# Altium PCB up_floor.PcbDoc
Units mil, origin at the board's own origin, x right, y up, seen from the top; angles counter-clockwise.
Board outline 1822 x 1679 mil, 2 copper layers (Top Layer, Bottom Layer); 53 components, 70 nets, 315 pads, 105 vias.
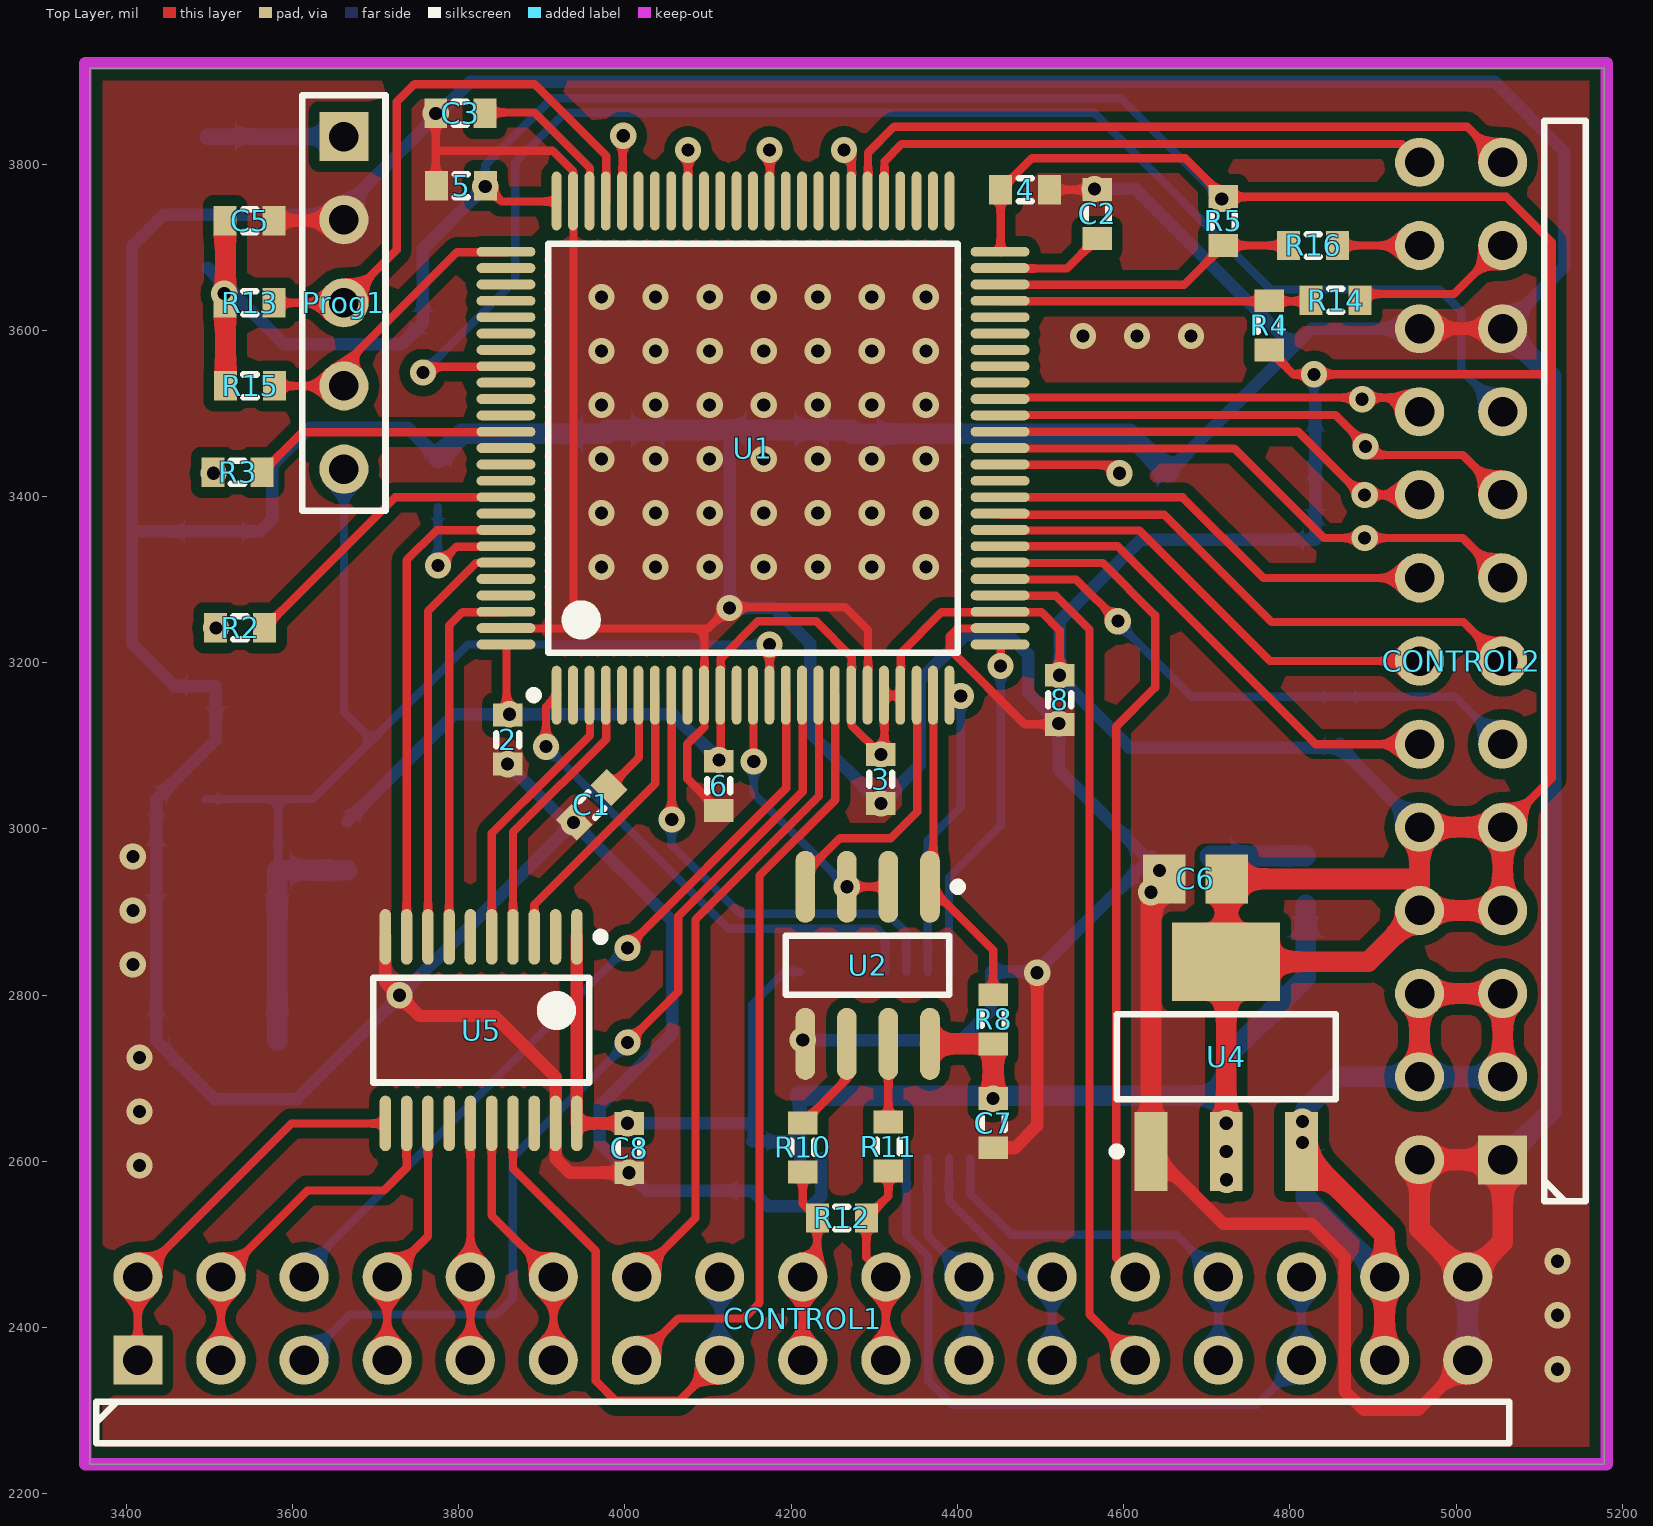
[diagram p0: Top Layer view]
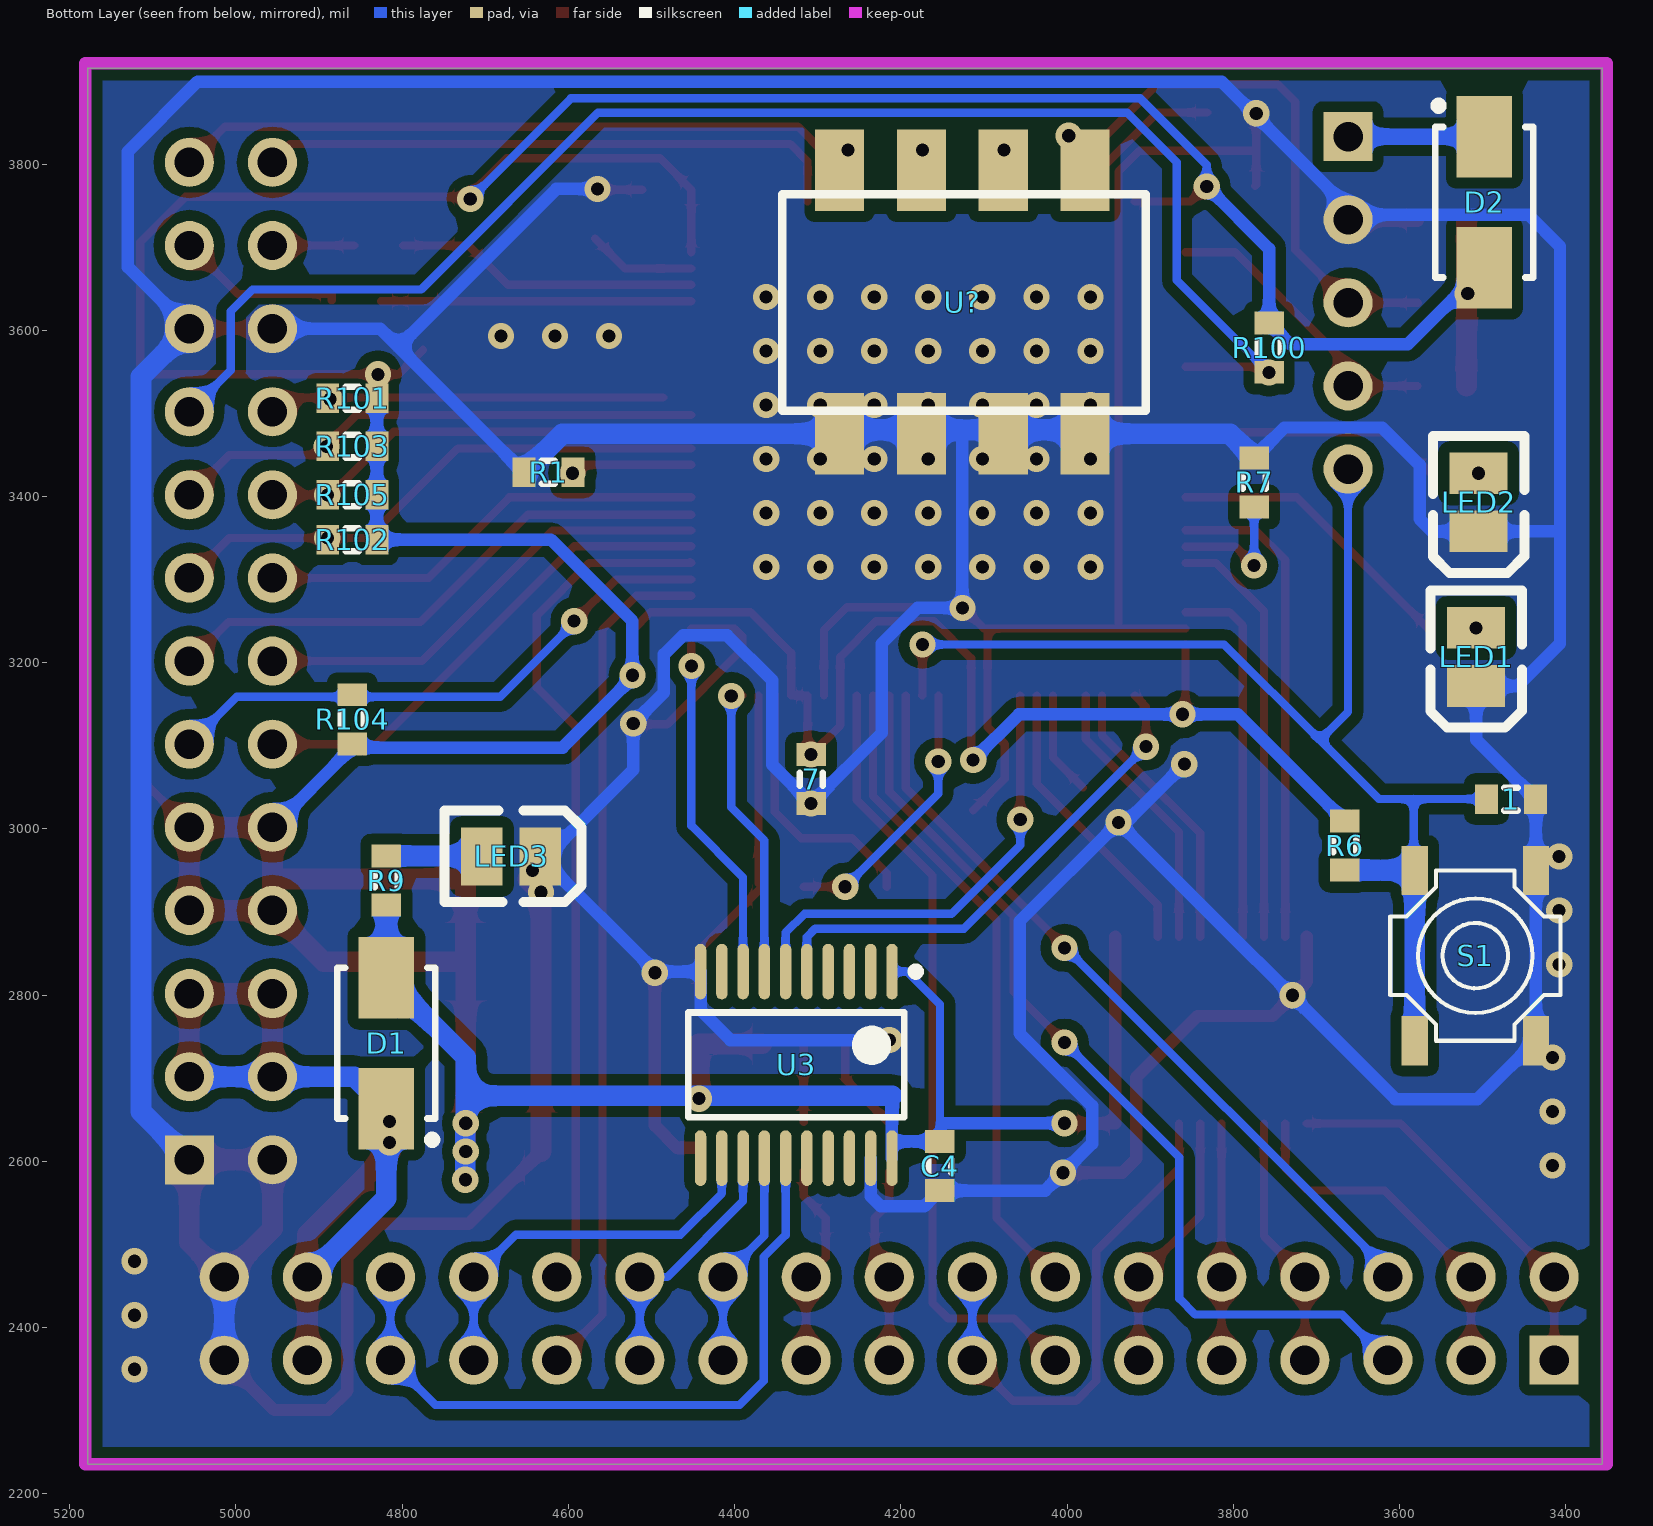
[diagram p1: Bottom Layer view, seen from below]

## Layer stack, top to bottom
Top Solder: solder mask 0.4, Solder Resist, Dk 3.5
Top Layer: signal copper 1.4
Dielectric 1: dielectric 12.6, FR-4, Dk 4.8
Bottom Layer: signal copper 1.4
Bottom Solder: solder mask 0.4, Solder Resist, Dk 3.5

## Board outline
3356,2236 5178,2236 5178,3915 3356,3915

## Design rules (kind name [scope] priority, off if disabled: settings)
AssemblyTestPointUsage [All] p1 off:
AssemblyTestpoint [All] p1 off: testpointundercomponent=TRUE minsize=40 maxsize=100 preferedsize=60 minholesize=0 maxholesize=40 preferedholesize=32 testpointgrid=1 usegrid=TRUE gridtolerance=0.01 allowsidetop=TRUE allowsidebottom=TRUE
Clearance Clearance_1 [All vs InPolygon] p1: gap=13 ignorepadtopadclearanceinfootprint=FALSE except(0: Arc-Hole Track-Hole SMDPad-Hole THPad-Hole Via-Hole Fill-Hole Poly-Hole Region-Hole Text-Hole)
Clearance [All] p2: gap=7 ignorepadtopadclearanceinfootprint=FALSE except(0: Arc-Hole Track-Hole SMDPad-Hole THPad-Hole Via-Hole Fill-Hole Poly-Hole Region-Hole Text-Hole)
ComponentClearance [All] p1 off: gap=10 collisioncheckmode=3 verticalgap=10 showdistances=FALSE
FabricationTestPointUsage [All] p1 off: valid=0 allowmultiple=FALSE
FabricationTestpoint [All] p1 off: side=3 testpointundercomponent=TRUE minsize=40 maxsize=100 preferedsize=60 minholesize=0 maxholesize=40 preferedholesize=32 testpointgrid=1 allowsidetop=TRUE allowsidebottom=TRUE usegrid=TRUE gridtolerance=0.01
Height [All] p1 off: minheight=0 maxheight=1000 prefheight=500
HoleSize [All] p1 off: absolutevalues=TRUE maxlimit=100 minlimit=1 maxpercent=80.000 minpercent=20.000
HoleToHoleClearance [All] p1 off: gap=10 allowstackedmicrovias=TRUE
LayerPairs [All] p1 off: enforce=TRUE
MinimumSolderMaskSliver [All] p1 off: minsoldermaskwidth=10
NetAntennae [All] p1 off: netantennaetolerance=0
PasteMaskExpansion [All] p1 off: expansion=0
PlaneConnect [All] p1: planeconnectstyle=Direct reliefexpansion=20 reliefentries=4 reliefconductorwidth=10 reliefairgap=10
PolygonConnect [All] p1: connectstyle=Direct reliefconductorwidth=10 reliefentries=4 polygonreliefangle="90 Angle" airgapwidth=10
RoutingVias [All] p1: holewidth=15.75 width=31.5 viastyle="Through Hole" minholewidth=11.81 minwidth=23.62 maxholewidth=28 maxwidth=50
SilkToSilkClearance [All] p1 off: silktosilkclearance=10
SilkToSolderMaskClearance [IsPad] p1 off: minsilkscreentomaskgap=10 clearancetoexposedcopper=TRUE
SolderMaskExpansion [All] p1 off: expansion=4
Width [All] p1: maxlimit=100 minlimit=10 preferedwidth=10
15 further rules are at their usual default settings.

## Components (designator, comment, footprint, x,y, rotation, side; value= is the part's Value field where it differs from the comment)
1 "" j1-0603 3466,3036 r0 bottom value=100nF
2 "" j1-0603 3859,3107.47 r90 top value=100nF
3 "" j1-0603 4308,3060 r90 top value=100nF
4 "" j1-0603 4481.47,3769 r180 top value=100nF
5 "" j1-0603 3803,3774 r0 top value=100nF
6 "" j1-0603 4113,3052 r90 top value=100nF
7 "" j1-0603 4308,3060 r90 bottom value=100nF
8 "" j1-0603 4523,3155.47 r90 top value=100nF
C1 "100uF/6V3" j1-0603 3960,3029 r45 top value=100nF
C2 "2.2uF" j1-0603 4568,3740 r90 top
C3 "2.2uF" j1-0603 3802,3861 r180 top
C4 "" j1-0603 4153,2594.53 r270 bottom value=100n
C5 "" j1-0603 3548.47,3732 r180 top value=100nF
C6 "Cap_El" 2012[0805] 4686.4,2940 r180 top value=10uF
C7 "Cap" j1-0603 4443,2646 r90 top value=100nF
C8 "" j1-0603 4005,2616 r270 top value=100n
CONTROL1 "" HDR2X17H 3414,2361 r0 top
CONTROL2 "" HDR2X13H 5056,2602 r90 top
D1 "1N4007" US1M 4819,2742.26 r270 bottom
D2 "1N4007" US1M 3498,3754 r90 bottom
LED1 "power" 3518 3508,3207 r270 bottom
LED2 "power" 3518 3505,3393 r270 bottom
LED3 "power" 3518 4669,2967 r180 bottom
Prog1 "Progrommer" HDR1x5 3662,3833 r270 top
R1 "10K" J1-0603 4624,3429 r180 bottom value=1K
R2 "Res1" j1-0603 3537,3242 r180 top value=220
R3 "Res1" j1-0603 3534,3429 r180 top value=220
R4 "4.7K" J1-0603 4775,3606 r90 top value=1K
R5 "4.7K" J1-0603 4720,3731.53 r270 top value=1K
R6 "10K" J1-0603 3666,2980 r270 bottom value=1K
R7 "10K" J1-0603 3775,3417 r270 bottom value=1K
R8 "Res1" j1-0603 4443,2771 r90 top value=10K
R9 "Res1" j1-0603 4819,2938 r90 bottom value=220
R10 "Res1" j1-0603 4214,2617 r270 top value=100
R11 "Res1" j1-0603 4317,2618 r270 top value=100
R12 "Res1" j1-0603 4261,2532 r0 top value=120
R13 "" J1-0603 3548.47,3633 r180 top value=10k
R14 "Res1" j1-0603 4855,3636 r0 top value=100
R15 "" J1-0603 3549,3533 r180 top value=10k
R16 "Res1" j1-0603 4828,3702 r0 top value=100
R100 "4k" j1-0603 3757,3579 r90 bottom
R101 "4k" j1-0603 4860,3518 r180 bottom
R102 "4k" j1-0603 4860,3348 r180 bottom
R103 "4k" j1-0603 4860,3460.69 r180 bottom
R104 "4k" j1-0603 4860,3132 r270 bottom
R105 "4k" j1-0603 4860,3402 r180 bottom
S1 "SW-PB" SW-PB-4P 3581.67,2745.28 r90 bottom
U1 "STM32F40X_41X-SQ100" 100A_N 4154.11,3458.24 r90 top
U2 "MAX485CSA" NSO8_N 4292,2836 r270 top
U3 "74hc245" 74hc245 4331.84,2718.2 r270 bottom
U4 "REG1117-3.3" SOT223 4723.45,2726.17 r90 top
U5 "74hc245" 74hc245 3821,2760 r270 top
U? "SW-DIP4" SW_NUM_4PIN 4126,3693 r180 bottom

## Footprints (in the part's own frame and the unit in brackets; to place one, negate y for a bottom-side part, rotate by r counter-clockwise, add the part's x,y. Pads: shape width x height; smd on the part's side, far side on the other; paste and mask are expansions set on the pad)
74hc245 [mm]
  oval 1.7x0.35 smd: 1(-2.799,3.077) 2(-2.799,2.427) 3(-2.799,1.777) 4(-2.799,1.127) 5(-2.799,0.477) 6(-2.799,-0.173) 7(-2.799,-0.823) 8(-2.799,-1.473) 9(-2.799,-2.123) 10(-2.799,-2.773) 11(2.901,-2.773) 12(2.901,-2.123) 13(2.901,-1.473) 14(2.901,-0.823) 15(2.901,-0.173) 16(2.901,0.477) 17(2.901,1.127) 18(2.901,1.777) 19(2.901,2.427) 20(2.901,3.077)
  silkscreen extent -2.92,-3.15 1.65,3.93, body extent -2.2,-3.15 2.3,3.45, height 1.2
100A_N [mm] "Thin QFP, 100-Leads, Body 14x14mm, Pitch 0.5mm, IPC Medium Density"
  oval 1.8x0.3 smd: 1(-7.55,6) 2(-7.55,5.5) 3(-7.55,5) 4(-7.55,4.5) 5(-7.55,4) 6(-7.55,3.5) 7(-7.55,3) 8(-7.55,2.5) 9(-7.55,2) 10(-7.55,1.5) 11(-7.55,1) 12(-7.55,0.5) 13(-7.55,0) 14(-7.55,-0.5) 15(-7.55,-1) 16(-7.55,-1.5) 17(-7.55,-2) 18(-7.55,-2.5) 19(-7.55,-3) 20(-7.55,-3.5) 21(-7.55,-4) 22(-7.55,-4.5) 23(-7.55,-5) 24(-7.55,-5.5) 25(-7.55,-6) 51(7.55,-6) 52(7.55,-5.5) 53(7.55,-5) 54(7.55,-4.5) 55(7.55,-4) 56(7.55,-3.5) 57(7.55,-3) 58(7.55,-2.5) 59(7.55,-2) 60(7.55,-1.5) 61(7.55,-1) 62(7.55,-0.5) 63(7.55,0) 64(7.55,0.5) 65(7.55,1) 66(7.55,1.5) 67(7.55,2) 68(7.55,2.5) 69(7.55,3) 70(7.55,3.5) 71(7.55,4) 72(7.55,4.5) 73(7.55,5) 74(7.55,5.5) 75(7.55,6)
  oval 0.3x1.8 smd: 26(-6,-7.55) 27(-5.5,-7.55) 28(-5,-7.55) 29(-4.5,-7.55) 30(-4,-7.55) 31(-3.5,-7.55) 32(-3,-7.55) 33(-2.5,-7.55) 34(-2,-7.55) 35(-1.5,-7.55) 36(-1,-7.55) 37(-0.5,-7.55) 38(0,-7.55) 39(0.5,-7.55) 40(1,-7.55) 41(1.5,-7.55) 42(2,-7.55) 43(2.5,-7.55) 44(3,-7.55) 45(3.5,-7.55) 46(4,-7.55) 47(4.5,-7.55) 48(5,-7.55) 49(5.5,-7.55) 50(6,-7.55) 76(6,7.55) 77(5.5,7.55) 78(5,7.55) 79(4.5,7.55) 80(4,7.55) 81(3.5,7.55) 82(3,7.55) 83(2.5,7.55) 84(2,7.55) 85(1.5,7.55) 86(1,7.55) 87(0.5,7.55) 88(0,7.55) 89(-0.5,7.55) 90(-1,7.55) 91(-1.5,7.55) 92(-2,7.55) 93(-2.5,7.55) 94(-3,7.55) 95(-3.5,7.55) 96(-4,7.55) 97(-4.5,7.55) 98(-5,7.55) 99(-5.5,7.55) 100(-6,7.55)
  silkscreen extent -7.67,-6.25 6.25,6.82, body extent -7,-7 7,7, height 1.2
2012[0805] [mm] "Chip Resistor; Body 2.0 x 1.3 mm (LxW typ)"
  rect 1.3x1.5 smd: 1(-0.95,0) 2(0.95,0)
  body extent -1.22,-0.75 1.28,0.75, height 0.5
3518 [mil]
  rect 50x70 smd: 1(35,0) 2(-35,0)
  silkscreen extent -80,-55 85,55, body extent -63,-31 63,32, height 43
HDR1x5 [mm] "Connector; Header; 5 Position"
  rect 1.5x1.5 hole 0.9: 1(0,0)
  round 1.5 hole 0.9: 2(2.54,0) 3(5.08,0) 4(7.62,0) 5(10.16,0)
  silkscreen extent -1.27,-1.27 11.43,1.27
HDR2X13H [mm] "Connector; Header; 13x2 Position; Right Angle"
  rect 1.5x1.5 hole 0.9: 1(0,0)
  round 1.5 hole 0.9: 2(0,2.54) 3(2.54,0) 4(2.54,2.54) 5(5.08,0) 6(5.08,2.54) 7(7.62,0) 8(7.62,2.54) 9(10.16,0) 10(10.16,2.54) 11(12.7,0) 12(12.7,2.54) 13(15.24,0) 14(15.24,2.54) 15(17.78,0) 16(17.78,2.54) 17(20.32,0) 18(20.32,2.54) 19(22.86,0) 20(22.86,2.54) 21(25.4,0) 22(25.4,2.54) 23(27.94,0) 24(27.94,2.54) 25(30.48,0) 26(30.48,2.54)
  silkscreen extent -1.27,-2.54 31.75,-1.27
HDR2X17H [mm] "Connector; Header; 17x2 Position; Right Angle"
  rect 1.5x1.5 hole 0.9: 1(0,0)
  round 1.5 hole 0.9: 2(0,2.54) 3(2.54,0) 4(2.54,2.54) 5(5.08,0) 6(5.08,2.54) 7(7.62,0) 8(7.62,2.54) 9(10.16,0) 10(10.16,2.54) 11(12.7,0) 12(12.7,2.54) 13(15.24,0) 14(15.24,2.54) 15(17.78,0) 16(17.78,2.54) 17(20.32,0) 18(20.32,2.54) 19(22.86,0) 20(22.86,2.54) 21(25.4,0) 22(25.4,2.54) 23(27.94,0) 24(27.94,2.54) 25(30.48,0) 26(30.48,2.54) 27(33.02,0) 28(33.02,2.54) 29(35.56,0) 30(35.56,2.54) 31(38.1,0) 32(38.1,2.54) 33(40.64,0) 34(40.64,2.54)
  silkscreen extent -1.27,-2.54 41.91,-1.27
j1-0603 [mm] "Chip Resistor, Body 1.6x0.8mm, IPC High Density"
  rect 0.7x0.9 smd: 1(-0.75,0) 2(0.75,0)
  silkscreen extent -0.2,-0.35 0.2,0.35, body extent -0.85,-0.48 0.85,0.48, height 0.9
J1-0603 [mm] "Chip Resistor, Body 1.6x0.8mm, IPC High Density"
  rect 0.7x0.9 smd: 1(-0.75,0) 2(0.75,0)
  silkscreen extent -0.2,-0.35 0.2,0.35, body extent -0.85,-0.48 0.85,0.48, height 0.9
NSO8_N [mm] "SOIC, 8-Leads, Body 4.9x3.9mm, Pitch 1.27mm, IPC Medium Density"
  oval 2.2x0.6 smd: 1(-2.4,1.905) 2(-2.4,0.635) 3(-2.4,-0.635) 4(-2.4,-1.905) 5(2.4,-1.905) 6(2.4,-0.635) 7(2.4,0.635) 8(2.4,1.905)
  silkscreen extent -2.52,-2.5 0.9,2.88, body extent -2,-2.5 2,2.5, height 1.75
SOT223 [mm] "SOT223, 4-Leads, Body 6.7x7.3mm (max), Pitch 2.30mm, IPC Medium Density"
  rect 2.4x1 smd: 1(-2.9,2.3) 2(-2.9,0) 3(-2.9,-2.3)
  rect 2.4x3.3 smd: 4(2.9,0)
  silkscreen extent -3.02,-3.35 1.3,3.47, body extent -1.85,-3.35 1.85,3.35, height 1.8
SW-PB-4P [mm]
  rect 1.5x0.8 smd: 1(0,0) 1(5.2,0) 2(0,-3.7) 2(5.2,-3.7)
  silkscreen extent 0,-4.45 5.2,0.75, body extent 0,-4.45 5.22,0.75, height 2.2
SW_NUM_4PIN [mm]
  rect 1.5x2.5 smd: 1(-3.75,-5.525) 2(-1.25,-5.525) 3(1.25,-5.525) 4(3.75,-5.525) 5(3.75,2.525) 6(1.25,2.525) 7(-1.25,2.525) 8(-3.75,2.525)
  silkscreen extent -5.5,-4.82 5.6,1.79
US1M [mm] "Molded Diode, 2-Leads, Body 4.3x2.6mm, IPC Medium Density"
  rect 2.5x1.7 smd: 1(-2,0) 2(2,0)
  silkscreen extent -2.3,-1.5 3.07,1.52, body extent -2.3,-1.46 2.3,1.46, height 2.3

## Part data
1 2 3 4 5 6 7 8 C5: library part Cap, "Capacitor", Manufacturer="Generic Components", Class=Passive, Published=08/06/2000, Publisher="Altium Hobart Technology Centre", SubClass=Capacitor
C1: library part Cap, "Capacitor", LatestRevisionDate=17-Jul-2002, LatestRevisionNote="Re-released for DXP Platform.", PackageReference=RAD-0.3, Published=8-Jun-2000, Publisher="Altium Limited"
C2 C3: library part Cap_UP, "Capacitor", LatestRevisionDate=17-Jul-2002, LatestRevisionNote="Re-released for DXP Platform.", PackageReference=RAD-0.3, Published=8-Jun-2000, Publisher="Altium Limited"
C4 C8: library part "Cap Pol1", "Polarized Capacitor (Radial)", Manufacturer="Generic Components", Class=Passive, Published=08/06/2000, Publisher="Altium Hobart Technology Centre", SubClass=Capacitor
C6 C7: "Capacitor", Publisher="Altium Limited"
  C6: PackageReference=CAPR5-4X5, Published=23-Sep-2002
  C7: LatestRevisionDate=17-Jul-2002, LatestRevisionNote="Re-released for DXP Platform.", PackageReference=RAD-0.3, Published=8-Jun-2000
CONTROL1: library part "Header 17X2H", "Header, 17-Pin, Dual row, Right Angle", LatestRevisionDate=17-Jul-2002, LatestRevisionNote="Re-released for DXP Platform.", Publisher="Altium Limited"
CONTROL2: library part "Header 13X2H", "Header, 13-Pin, Dual row, Right Angle", LatestRevisionDate=17-Jul-2002, LatestRevisionNote="Re-released for DXP Platform.", Publisher="Altium Limited"
D1 D2: library part Diode, "1 Amp General Purpose Rectifier", Package Information="Latest Revision: Aug-1999", Package Reference=DO-41, Code - JEDEC=DO-204-AL, Datasheet="Latest Revision: 1998", Published=8-Jun-2000, Publisher="Altium Limited", Revision 1="11-Jul-2000: SIM Model Added.", Revision 2="17-Jul-2002: Re-released for DXP Platform."
LED1 LED2 LED3: library part LED3, "Typical BLUE SiC LED", PackageDocument=16-Apr-2002, DatasheetDocument=16-Apr-2002, LatestRevisionDate=17-Dec-2003, LatestRevisionNote="PCB Footprint replaced.", PackageReference=3.5X2.8X1.9, Published=8-Jun-2000, Publisher="Altium Limited"
Prog1: library part "Header 5", "Header, 5-Pin", LatestRevisionDate=17-Jul-2002, LatestRevisionNote="Re-released for DXP Platform.", Publisher="Altium Limited"
R1 R4 R5 R6 R7 R100 R101 R102 R103 R104 R105: library part Res1, "Resistor", LatestRevisionDate=17-Jul-2002, LatestRevisionNote="Re-released for DXP Platform.", PackageReference=AXIAL-0.3, Published=8-Jun-2000, Publisher="Altium Limited"
R2 R3 R8 R9 R10 R11 R12 R14 R16: "Resistor", LatestRevisionDate=17-Jul-2002, LatestRevisionNote="Re-released for DXP Platform.", PackageReference=AXIAL-0.3, Published=8-Jun-2000, Publisher="Altium Limited"
R13 R15: library part Res, "Semiconductor Resistor", LatestRevisionDate=17-Jul-2002, LatestRevisionNote="Re-released for DXP Platform.", PackageReference=AXIAL-0.5, Published=8-Jun-2000, Publisher="Altium Limited"
S1: "Switch", LatestRevisionDate=17-Jul-2002, LatestRevisionNote="Re-released for DXP Platform.", PackageReference=SPST-2, Published=24-Mar-1999, Publisher="Altium Limited"
U2: "Low-Power, Slew-Rate-Limited RS-485/RS-422 Transceiver", Code_IPC=SOIC127P600-8, Code_JEDEC=MS-012-AA, ComponentLink1Description="Manufacturer Link", ComponentLink1URL=http://www.maxim-ic.com/, ComponentLink2Description=Datasheet, ComponentLink2URL=http://pdfserv.maxim-ic.com/en/ds/MAX1487-MAX491.pdf, DatasheetVersion=Feb-1996, LatestRevisionDate=13-Apr-2006, LatestRevisionNote="IPC-7351 Footprint Added.", PackageDescription="8-Pin Small Outline Integrated Circuit 1.27 mm Pitch", PackageReference=NSO8, Published=16-Jan-2001, Publisher="Altium Limited"
U4: "800mA and 1A Low Dropout Positive Regulator 2.85V, 3.3V, 5V, and Adjustable", ComponentLink1Description="Manufacturer Link", ComponentLink1URL=http://www.ti.com/, ComponentLink2Description=Datasheet, ComponentLink2URL=http://www-s.ti.com/sc/ds/REG1117.pdf, DatasheetVersion=Sep-1997, LatestRevisionDate=17-Jul-2002, LatestRevisionNote="Re-released for DXP Platform.", PackageDescription="SOT-223/SC-73; 4 Leads; Body 6.7 x 7.3 mm, inc. leads (LxW max)", PackageReference=ZZ311, PackageVersion=revC, Published=8-Jun-2000, Publisher="Altium Limited"

## Via types
v1: diameter 31.5, hole 15.75, Top Layer to Bottom Layer, tented both sides, 105 vias

## Nets (pads, with @x,y where several pads share a name; then routed paths per layer and width w, separated by ;. In a path a pad name is that pad's centre, name@x,y a point inside that pad or via, vN(x,y) a via of type N, cw(c..) or ccw(c..) an arc to the next point about the centre after c; other vN are vias at no path point)
+3.3: 2.2 3.2 4.2 5.2 6.2 7.2 8.2 C4.1 C5.2 C6.1 C7.2 C8.1 CONTROL2.7 CONTROL2.8 CONTROL2.9 CONTROL2.10 D1.1 D2.1 R4.1 R5.1 R6.1 R8.1 R9.1 R13.2 R15.2 R100.2 R101.2 R102.2 R103.2 R104.2 R105.2 U1.11 U1.19 U1.21 U1.22 U1.28 U1.50 U1.75 U1.100 U2.8 U3.1 U3.20 U4.2 U4.4 U5.1 U5.20 | length 9325.4
  Top Layer w10: 5.2 3851.54,3754.98 U1.75@3918.54,3754.98 ; U1.100@3857.51,3221.52 3857.51,3138.49 2.2 ; 6.2 4115.39,3083.91 4115.39,3205.39 4159.75,3249.75 4230.25,3249.75 4272.87,3207.13 4272.87,3124.66 v1(4308,3089.53) 4312.24,3093.76 4312.24,3160.5 4331.92,3160.5 4331.92,3211.92 4380.89,3260.89 4501.11,3260.89 4523,3239 v1(4523,3185) ; U1.50@4452,3693.96 4452,3768.95 4.2 4489.94,3807 4674.06,3807 R5.1 4720,3760.47 5060.53,3760.47 5115,3706 5115,3547 ; R4.1 4804.47,3547 v1(4829,3547) 5115,3547 ; CONTROL2.9 5115,3061 5115,3547
  Top Layer w15: U5.1 U5.20 4004.73,2645.8 C8.1
  Top Layer w25: C5.2 3519.47,3731.47 R15.2 ; U2.8 R8.1 R8.1 v1(4443,2675.53) ; v1(4723.45,2612) v1(4723.45,2646) U4.4 ; U4.4 4894.35,2840.35 CONTROL2.8 ; U4.4 4723.8,2840.7 C6.1 4955,2940 4956,2939 ; CONTROL2.8 4956,2939 ; CONTROL2.8 CONTROL2.7 CONTROL2.9 CONTROL2.10 4956,2939
  Bottom Layer w10: v1(3832,3773) 3832,3799 3912,3879 4597,3879 v1(4718,3758) ; C4.1 4153,2789 4192.41,2828.41 U3.1 ; v1(4829,3547) 4829,3519.47 R101.2
  Bottom Layer w15: D2.1 3590.26,3583 3731.47,3583 R100.2 3757,3698 v1(3832,3773) ; R6.1 3794.47,3138 v1(3861,3138) 4058,3138 v1(4113,3083) ; v1(4003,2646) 4151,2646 ; C4.1 U3.20@4210.69,2624.06 ; U3.20 U3.20@4210.69,2624.06 ; 4210.69,2679 U3.20@4210.69,2624.06 ; v1(4723.45,2646) 4723.45,2647.55 4724,2647 v1@4724,2646 ; R101.2 R103.2 R105.2 R102.2 4621,3348 4523,3250 v1(4523,3185) 4523,3182 4607,3098 R104.2@4860,3098 ; R104.2 R104.2@4860,3098 ; CONTROL2.10 R104.2@4860,3098
  Bottom Layer w25: 4210.69,2679 4723.45,2679 ; v1@4723.45,2647.55 4723.45,2679 ; v1(4724,2578) v1@4724,2646 ; R9.1 D1.1 4723.45,2725.45 4723.45,2679
  other v1: 3518,3644
+5: CONTROL1.31 CONTROL1.32 CONTROL2.3 CONTROL2.4 CONTROL2.5 CONTROL2.6 D1.2 U4.3 | length 1087.2
  Top Layer w25: U4.3 4914,2512 CONTROL1.32 CONTROL1.31 ; CONTROL2.4 CONTROL2.6 CONTROL2.5 CONTROL2.3
  Bottom Layer w25: CONTROL1.32 4819,2556 D1.2 4857.48,2702 CONTROL2.4 CONTROL2.3
  other v1: 4815,2623 4815,2648
A_RESET: 1.2 Prog1.5 R6.2 S1.1 U1.14 | length 1532.4
  Top Layer w10: v1(4174,3222) 4174,3160.94 U1.14@4174.44,3160.5
  Bottom Layer w10: 1.2 3583,3036 ; S1.1@3581.67,2950 3582.14,2950.47 3583,2951.33 3583,3036 ; Prog1.5 3662,3141 3696,3107 ; v1(4174,3222) 3811,3222 3696,3107 ; 3583,3036 3625,3036 3696,3107
  Bottom Layer w25: S1.1@3581.67,2745.28 S1.1@3581.67,2950 ; S1.1@3582.14,2950.47 R6.2
AD0: U1.57 U?.8 | length 65.9
  Top Layer w10: v1(4263.56,3817) 4272.87,3807.69 U1.57@4272.87,3754.98
AD1: U1.62 U?.7 | length 62.2
  Top Layer w10: v1(4174,3817) 4174.44,3816.56 U1.62@4174.44,3754.98
AD2: U1.67 U?.6 | length 63
  Top Layer w10: U1.67@4076.02,3754.98 v1(4076,3817) v1@4076.02,3817.98
AD3: U1.71 U?.5 | length 79.3
  Top Layer w10: U1.71@3997.28,3754.98 3997.28,3833.28 v1(3998,3834)
ADC_extra: CONTROL2.16 U1.35 | length 544.2
  Top Layer w10: U1.35@4452,3399 4671,3399 4768,3302 CONTROL2.16
Current1: CONTROL1.26 U1.31 | length 1038.9
  Top Layer w10: U1.31@4453.3,3321.25 4452,3319.94 4575.06,3319.94 4638,3257 4638,3170 4591,3123 4591,2484 CONTROL1.26
Current2: CONTROL1.6 U1.15 | length 940.5
  Top Layer w10: v1(4003,2857) 4003,2858.24 4194.13,3049.36 U1.15@4194.13,3160.5
  Bottom Layer w10: CONTROL1.6 3614,2469.24 4001.76,2857 v1(4003,2857)
Current3: CONTROL1.14 U1.17 | length 790.4
  Top Layer w10: CONTROL1.14 4085,2532 4085,2891.04 4233.5,3039.54 U1.17@4233.5,3160.5
Current11: CONTROL1.25 U1.29 | length 1025.6
  Top Layer w10: U1.29@4452,3280.57 4518.43,3280.57 4559,3240 4559,2416 CONTROL1.25
Current22: CONTROL1.5 U1.16 | length 1151.6
  Top Layer w10: v1(4003,2743) 4064,2804 4064,2895 4213.81,3044.81 U1.16@4213.81,3160.5
  Bottom Layer w10: CONTROL1.5 3669,2416 3846,2416 3865,2435 3865,2605 v1(4003,2743)
Current33: CONTROL1.13 U1.18 | length 944.8
  Top Layer w10: CONTROL1.13 4064,2411 4143,2411 4162,2430 4162,2944 4253.18,3035.18 U1.18@4253.18,3160.5
D+: CONTROL1.17 CONTROL1.18 R10.2 R12.1 | length 240.9
  Top Layer w10: CONTROL1.17 CONTROL1.18 4231.47,2478.47 R12.1 4214,2549.47 R10.2
D-: CONTROL1.19 CONTROL1.20 R11.2 R12.2 | length 248.2
  Top Layer w10: CONTROL1.19 CONTROL1.20 4290.53,2484.47 R12.2 4317,2558.47 R11.2
EN_max: U1.13 U2.2 U2.3 | length 326.5
  Top Layer w10: U1.13@4154.76,3160.5 4154.76,3081.24 v1(4155,3081) ; v1(4267,2930.49) U2.2
  Bottom Layer w10: v1(4155,3081) 4155,3042.49 v1(4267,2930.49)
encoder1: CONTROL2.11 R104.1 U1.30 | length 689.1
  Top Layer w10: U1.30@4452,3300.26 4542.74,3300.26 v1(4593,3250)
  Bottom Layer w10: v1(4593,3250) 4592,3250 4591.5,3249.5 4682,3159 4999,3159 CONTROL2.11
encoder2: CONTROL2.15 R102.1 U1.38 | length 668.5
  Top Layer w10: U1.38@4452,3457.74 4733.26,3457.74 4841,3350 v1(4890,3350) 5008,3350 CONTROL2.15
encoder3: CONTROL2.19 R100.1 U1.83 | length 1805.8
  Top Layer w10: v1(3757,3549) 3764.17,3556.17 U1.83@3857.51,3556.17
  Bottom Layer w10: v1(3757,3549) 3868,3660 3868,3802 3927.75,3861.75 4564.25,3861.75 4777,3649 4980,3649 5006,3623 5006,3552 CONTROL2.19
encoder_dir1: CONTROL2.18 R105.1 U1.39 | length 540.2
  Top Layer w10: U1.39@4452,3478 4810,3478 4886,3402 v1(4890,3402) CONTROL2.18 CONTROL2.18@4952.69,3398.69
Encoder_dir2: CONTROL2.17 R103.1 U1.40 | length 643.8
  Top Layer w10: U1.40@4452,3498 4855,3498 4903,3450 5008,3450 CONTROL2.17
  other v1: 4891,3460
Encoder_dir3: CONTROL2.20 R101.1 U1.41 | length 478.1
  Top Layer w10: U1.41@4486,3519 4939,3519 CONTROL2.20 CONTROL2.20@4955.25,3501.25
  other v1: 4887,3517
Fan_EN: CONTROL1.29 CONTROL1.30 U3.15 | length 862.3
  Bottom Layer w10: U3.15 4338.64,2511.36 4365,2485 4365,2336 4394,2307 4760,2307 CONTROL1.29 CONTROL1.30
GND: 1.1 2.1 3.1 4.1 5.1 6.1 7.1 8.1 C1.1 C2.2 C3.2 C4.2 C5.1 C6.2 C7.1 C8.2 CONTROL1.33 CONTROL1.34 CONTROL2.1 CONTROL2.2 CONTROL2.21 CONTROL2.22 LED1.1 LED2.1 LED3.1 Prog1.2 R1.1 R7.1 S1.2 U1.10 U1.20 U1.27 U1.74 U1.99 U2.5 U3.10 U3.19 U4.1 U5.10 U5.19 U?.1 U?.2 U?.3 U?.4 | length 13944.7
  Top Layer w10: v1(3772.47,3861) 3772.47,3818 ; 5.1 3772.47,3775 3772.47,3818 ; U1.99@3857.51,3241.2 3939,3241.2 ; 6.1 4075,3060.47 4075,3102 4095.7,3122.7 4095.7,3241.2 ; U1.20@4292.55,3160.5 4292.55,3239.45 4265.25,3266.75 4125.75,3266.75 4100.2,3241.2 4095.7,3241.2 ; U1.27@4452,3241.2 4400.2,3241.2 4391,3232 4391,3216 4481.06,3125.94 8.1 ; 4.1 4567.47,3769 C2.2 ; 3772.47,3818 3774.49,3815.98 3912.98,3815.98 3938.22,3790.74 3938.22,3241.98 3939,3241.2 ; 3939,3241.2 4095.7,3241.2
  Top Layer w15: C5.1 3661,3732 Prog1.2 ; U5.10 3711.84,2816.16 3753,2775 3843,2775 3916.57,2701.43 U5.19 3916.57,2603.43 3933.53,2586.47 v1(4005,2586.47) ; C7.1 4469.47,2616.47 4496,2643 v1(4496,2827) ; U4.1 4719.9,2525 4826,2525 4866,2485 4866,2324 4889,2301 4954,2301 CONTROL1.33 ; CONTROL2.22 CONTROL2.21
  Top Layer w25: U4.1 v1(4632.9,2923.9) C6.2 ; 4956,2519 CONTROL2.2 CONTROL2.1 5056,2503 CONTROL1.34 4956,2519
  Bottom Layer w15: Prog1.2 Prog1.2@3662,3738.97 ; R7.1 3738.53,3483 3621,3483 3576,3438 3576,3373 3561,3358 LED2.1 3409,3358 3407,3360 ; v1(3859,3077.94) 3928.94,3008 v1(3938,3008) ; 4121,3480.07 4126,3475.07 v1(4126,3266) 4180,3266 4223,3223 4223,3115.47 v1(4308,3030.47) 4355,3077.47 4355,3179 4409,3233 4462,3233 4485,3210 4485,3164 v1(4522,3127) 4522,3071 LED3.1@4630,2963 ; v1(4214,2746) 4405,2746 4441,2782 U3.10 4495.41,2828.41 LED3.1@4630,2963 ; U3.19 4236.28,2558.28 4224,2546 4172,2546 C4.2 4026.47,2565 v1(4005,2586.47) 3970,2621.47 3970,2667 4057,2754 4057,2889 v1(3938,3008) ; v1(4565,3770) 4614.53,3770 4804.53,3580 ; LED3.1 LED3.1@4630,2963 ; v1(4643,2950) LED3.1@4630,2963 ; R1.1 4804.53,3580 ; CONTROL2.22 4826.53,3602 4804.53,3580 ; CONTROL2.21 5130,3676 5130,3815 5046,3899 3814,3899 3662,3747 Prog1.2@3662,3738.97 ; 3407,3360 3407,3701 3444.97,3738.97 Prog1.2@3662,3738.97 ; 3407,3360 3407,3223 3458,3172 LED1.1 3508,3107.53 1.1 3436,3035.53 3436,2950 3436,2745.28 3506.28,2675 3605,2675 v1(3938,3008)
  Bottom Layer w25: R7.1 3803.95,3475.48 U?.4 ; U?.4@3978.57,3480.07 4121,3480.07 U?.1@4273.85,3480.07 ; U?.1 4607.07,3475.48 R1.1 ; CONTROL1.33 CONTROL1.34 ; CONTROL2.1 5114,2660 5114,3544 CONTROL2.21
  other v1: 5122,2350 5122,2415 5122,2480 3416,2595 3416,2660 3416,2725 3729,2800 3408,2837 3408,2902 3408,2967 3972,3315 4037,3315 4102,3315 4167,3315 4232,3315 4297,3315 4362,3315 3972,3380 4037,3380 4102,3380 4167,3380 4232,3380 4297,3380 4362,3380 3972,3445 4037,3445 4102,3445 4167,3445 4232,3445 4297,3445 4362,3445 3972,3510 4037,3510 4102,3510 4167,3510 4232,3510 4297,3510 4362,3510 3972,3575 4037,3575 4102,3575 4167,3575 4232,3575 4297,3575 4362,3575 4551,3593 4616,3593 4681,3593 3972,3640 4037,3640 4102,3640 4167,3640 4232,3640 4297,3640 4362,3640
ICINA-1: CONTROL1.21 CONTROL1.22 U3.14 | length 263.6
  Bottom Layer w10: U3.14 4364.23,2510.77 CONTROL1.22 CONTROL1.21
ICINA-2: CONTROL1.1 CONTROL1.2 U5.11 | length 474.4
  Top Layer w10: CONTROL1.1 CONTROL1.2 3598.8,2645.8 U5.11
ICINA-3: CONTROL1.9 CONTROL1.10 U5.15 | length 284.9
  Top Layer w10: CONTROL1.9 3814.2,2361.2 U5.15
ICINB-1: CONTROL1.27 CONTROL1.28 U3.12 | length 482.7
  Bottom Layer w10: U3.12 4415.41,2561.59 4465,2512 4663,2512 CONTROL1.28 CONTROL1.27
ICINB-2: CONTROL1.7 CONTROL1.8 U5.13 | length 305.1
  Top Layer w10: CONTROL1.7 CONTROL1.8 3763.02,2510.02 U5.13
ICINB-3: CONTROL1.15 CONTROL1.16 U5.17 | length 630.3
  Top Layer w10: U5.17 3865.39,2591.61 3965,2492 3965,2336 3989,2312 4065,2312 CONTROL1.15
  Bottom Layer w10: CONTROL1.15 CONTROL1.16
ICPWM-1: CONTROL1.23 CONTROL1.24 U3.13 | length 313.8
  Bottom Layer w10: U3.13 4389.82,2552.18 4481,2461 CONTROL1.24 CONTROL1.23
ICPWM-2: CONTROL1.3 CONTROL1.4 U5.12 | length 431.2
  Top Layer w10: CONTROL1.3 CONTROL1.4 3618,2565 3710,2565 3737.43,2592.43 U5.12
ICPWM-3: CONTROL1.11 CONTROL1.12 U5.16 | length 315.5
  Top Layer w10: U5.16 3839.8,2535.2 CONTROL1.12 CONTROL1.11
INA-1: U1.8 U3.6 | length 552.7
  Top Layer w10: v1(4056.33,3011.33) U1.8@4056.33,3160.5
  Bottom Layer w10: v1(4056.33,3011.33) 4056.33,2980.67 4139,2898 4316,2898 4338.64,2875.36 U3.6
INA-2: U1.93 U5.9 | length 588.2
  Top Layer w10: U5.9 3737.43,3323.43 3773.32,3359.32 U1.93@3857.51,3359.32
INA-3: U1.3 U5.5 | length 339.4
  Top Layer w10: U5.5 3839.8,2994.8 3916.25,3071.25 3916.49,3071.25 3957.91,3112.66 U1.3@3957.91,3160.5
INB-1: U1.26 U3.8 | length 418.9
  Top Layer w10: v1(4452,3196) U1.26@4452,3221.52
  Bottom Layer w10: U3.8 4389.82,2941.82 4452,3004 v1(4452,3196)
INB-2: U1.98 U5.7 | length 450
  Top Layer w10: U5.7 3788.61,3244.61 3804.89,3260.89 U1.98@3857.51,3260.89
INB-3: U1.7 U5.3 | length 350.8
  Top Layer w10: U5.3@3891,2870 3891,2909 4036.65,3054.65 U1.7@4036.65,3160.5
LED1: R2.1 U1.91 | length 356
  Top Layer w10: R2.1 3723.53,3399 U1.91@3857.51,3399
LED2: R3.1 U1.87 | length 314
  Top Layer w10: R3.1 3611.95,3477.43 U1.87@3857.51,3477.43
MFan_EN: U1.1 U3.5 | length 611.6
  Top Layer w10: v1(3905,3099) 3905,3146.96 U1.1@3918.54,3160.5
  Bottom Layer w10: v1(3905,3099) 4124,2880 4303,2880 4313.05,2869.95 U3.5
NetC1_2: C1.2 U1.6 | length 125.6
  Top Layer w10: C1.2 4016.96,3085.96 U1.6@4016.96,3160.5
NetC2_1: C2.1 U1.49 | length 131
  Top Layer w10: U1.49@4452,3674.28 4531.8,3674.28 C2.1
NetC3_1: C3.1 U1.73 | length 194.2
  Top Layer w10: C3.1@3831.53,3862 3891,3862 3957.91,3795.09 U1.73@3957.91,3754.98
NetD2_2: D2.2 Prog1.1 | length 164.1
  Bottom Layer w20: D2.2 3498.26,3833 Prog1.1
NetLED1_1: LED1.2 R2.2
  other v1: 3508,3242
NetLED2_1: LED2.2 R3.2
  other v1: 3505,3428
NetLED3_1: LED3.2 R9.2 | length 115.2
  Bottom Layer w25: LED3.2 4704.53,2967.53 R9.2
NetR1_2: R1.2 U1.37 | length 147.2
  Top Layer w10: U1.37@4452,3438.06 4584.94,3438.06 v1(4595,3428)
NetR7_2: R7.2 U1.94 | length 162.4
  Top Layer w10: v1(3775,3317) 3797.63,3339.63 U1.94@3857.51,3339.63
  Bottom Layer w10: v1(3775,3317) R7.2
NetR10_1: R10.1 U2.6 | length 116.9
  Top Layer w10: R10.1 4267,2699.53 U2.6
NetR11_1: R11.1 U2.7 | length 94
  Top Layer w10: R11.1 U2.7
POT1: CONTROL2.12 U1.32 | length 602.6
  Top Layer w10: U1.32@4452,3340 4593,3340 4831,3102 CONTROL2.12
POT2: CONTROL2.14 U1.33 | length 569
  Top Layer w10: U1.33@4452,3359 4619,3359 4776,3202 CONTROL2.14
POT3: CONTROL2.13 U1.34 | length 676.9
  Top Layer w10: U1.34@4452,3378 4649,3378 4778,3249 5009,3249 CONTROL2.13
PWM-1: U1.25 U3.7 | length 361.3
  Top Layer w10: U1.25@4390.98,3160.5 4403.5,3160.5 v1(4404,3160)
  Bottom Layer w10: U3.7 4364.23,2986.23 4404,3026 v1(4404,3160)
PWM-2: U1.95 U5.8 | length 510.3
  Top Layer w10: U5.8 3763.02,3262.02 3820.94,3319.94 U1.95@3857.51,3319.94
PWM-3: U1.4 U5.4 | length 336.9
  Top Layer w10: U5.4 3865.39,2996.34 3923.29,3054.25 3923.54,3054.25 3977.59,3108.31 U1.4@3977.59,3160.5
RXUSART: R8.2 U1.24 U2.1 | length 393.2
  Top Layer w10: U1.24@4371.29,3160.5 4371.29,2934.78 U2.1 4443,2854.49 R8.2
RXUSART_extra: CONTROL2.25 U1.56 | length 852.9
  Top Layer w10: U1.56@4292.55,3754.98 4292.55,3813.55 4324,3845 5013,3845 CONTROL2.25
SCL: R4.2 R14.1 U1.47 | length 373.5
  Top Layer w10: U1.47@4452,3634.91 R14.1@4825.47,3634.91
SCL1: CONTROL2.23 R14.2 | length 203.2
  Top Layer w10: R14.2 4884.53,3643.53 4997.53,3643.53 CONTROL2.23
SDA: R5.2 R16.1 U1.48 | length 366.1
  Top Layer w10: U1.48@4452,3654.59 4672.59,3654.59 R5.2 R16.1
SDA1: CONTROL2.24 R16.2 | length 98.5
  Top Layer w10: R16.2 CONTROL2.24
SWCLK: Prog1.4 R15.1 U1.76 | length 360.3
  Top Layer w10: R15.1 Prog1.4 3662,3558 3797.96,3693.96 U1.76@3857.51,3693.96
SWDIO: Prog1.3 R13.1 U1.72 | length 703.1
  Top Layer w10: R13.1 Prog1.3 3725.5,3696.5 3725.5,3874.5 3747,3896 3891,3896 3977.59,3809.41 U1.72@3977.59,3754.98
TXUSART: U1.23 U2.4 | length 321.5
  Top Layer w10: U2.4 4217,2947 4259,2989 4320,2989 4351.61,3020.61 U1.23@4351.61,3160.5
TXUSART_extra: CONTROL2.26 U1.55 | length 709.3
  Top Layer w10: U1.55@4312.24,3754.98 4312.24,3803.24 4333,3824 4935,3824 CONTROL2.26@4956,3803
pads on no net: U1.2 U1.5 U1.9 U1.12 U1.36 U1.42 U1.43 U1.44 U1.45 U1.46 U1.51 U1.52 U1.53 U1.54 U1.58 U1.59 U1.60 U1.61 U1.63 U1.64 U1.65 U1.66 U1.68 U1.69 U1.70 U1.77 U1.78 U1.79 U1.80 U1.81 U1.82 U1.84 U1.85 U1.86 U1.88 U1.89 U1.90 U1.92 U1.96 U1.97 U3.2 U3.3 U3.4 U3.9 U3.11 U3.16 U3.17 U3.18 U5.2 U5.6 U5.14 U5.18

## Polygon pours and split planes (outlines as drawn)
GND on Top Layer "Bottom Layer-No Net" (solid, pour order 0): 3351,2236 3351,3921 5181,3921 5181,2236
GND on Bottom Layer "Bottom Layer-No Net" (solid, pour order 2): 3351,2236 3351,3921 5181,3921 5181,2243

## Keep-outs
Keep-Out Layer:
  lines w15: 3351,2236 5181,2236 5181,3921 3351,3921 3351,2236